# EAGLE board Met (EAGLE 9.5.1)
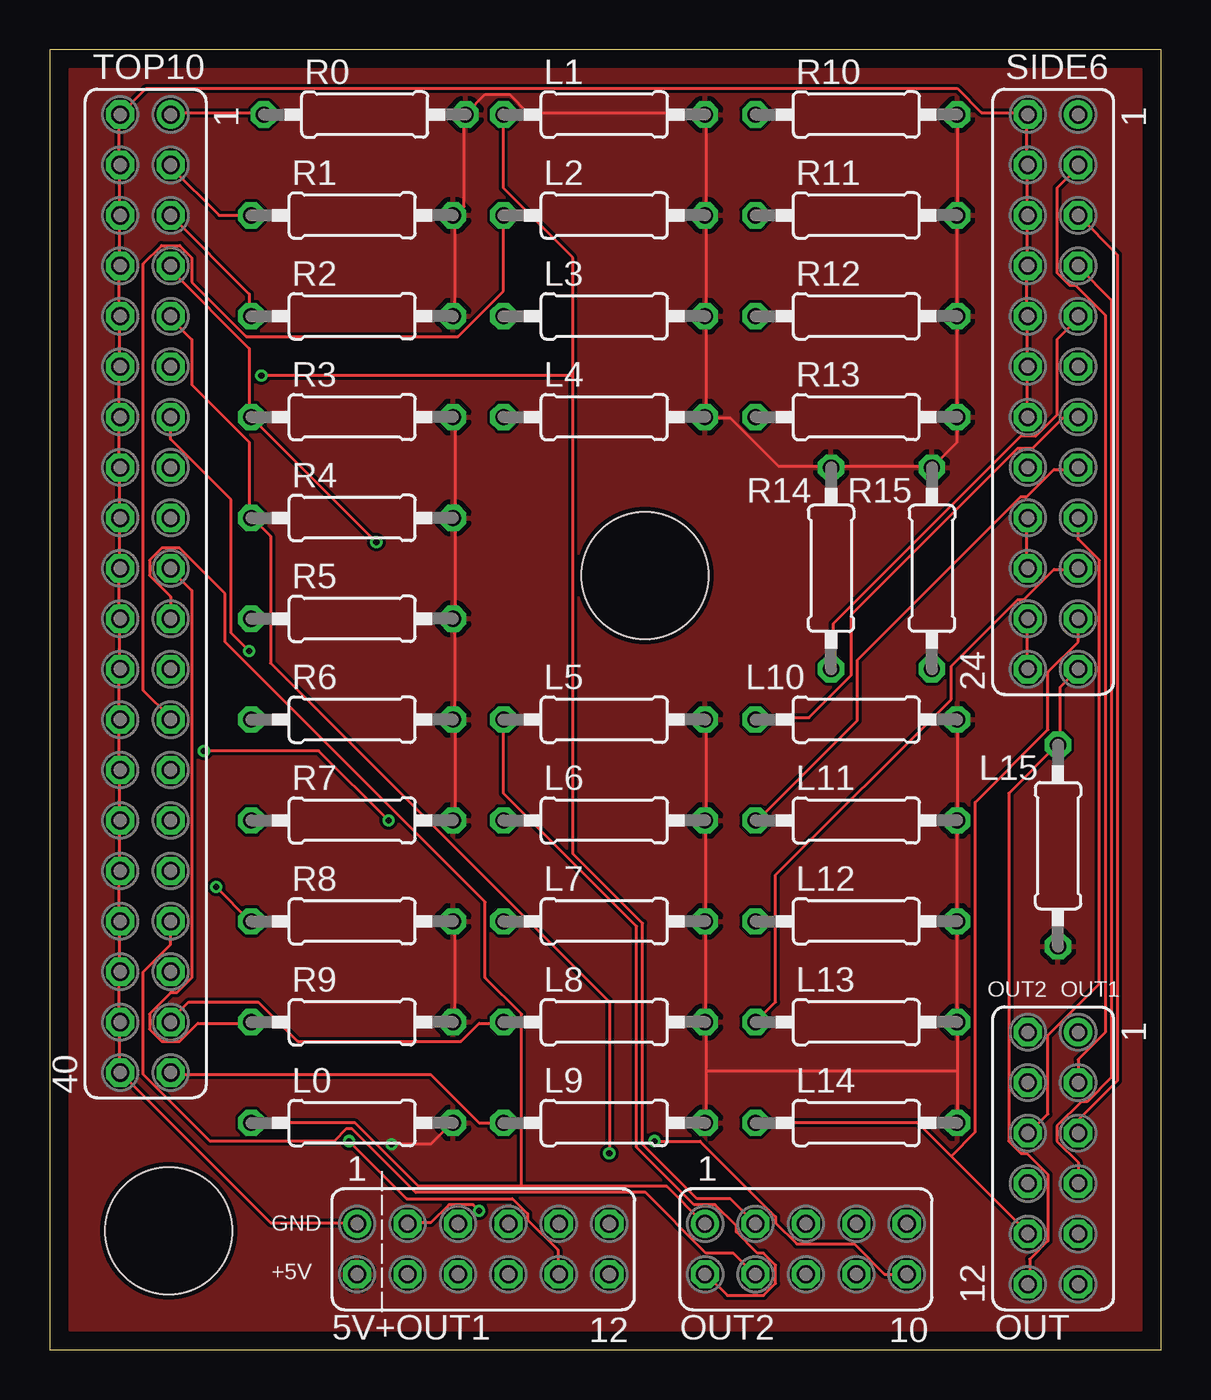
[diagram p0: board, top side]
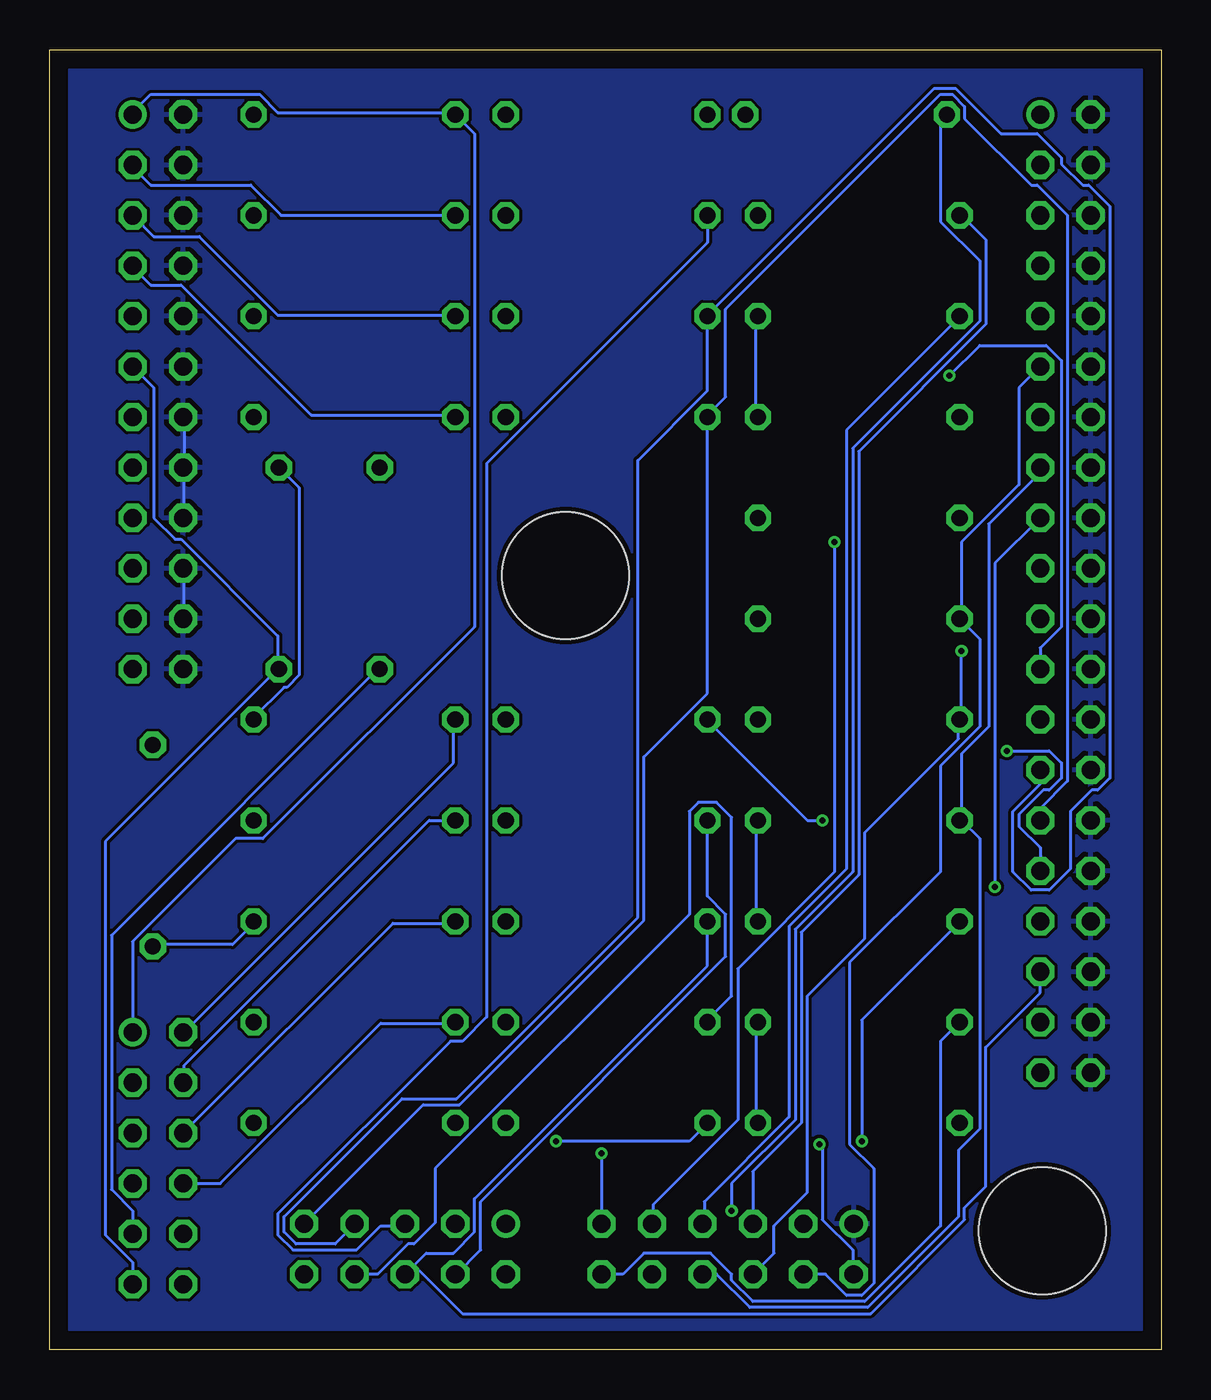
[diagram p1: board, bottom side, seen from below]

Size 56 x 65.5 mm. Coordinates in mm from the lower left corner, seen from the top.
Outline: 0,0 56,0 56,65.5 0,65.5 0,0
Copper layers (1*16): Top 0.035mm / dielectric 1.5mm / Bottom 0.035mm
Design rules "SeeedStudio_2layer_DRU_no_angle_20140221": minimum track width 6mil, minimum drill 12mil, track to track 6mil, track to pad 6mil, pad to pad 6mil, via to via 6mil, smd to smd 0mil, copper to edge 10mil, drill to drill 10mil, minimum pad ring 10mil, minimum via ring 6mil, stop-mask expansion 2mil, vias tented up to drill 100mil, thermal gap 10mil
Holes 6.4 mm at 6,6 30,39

## Footprints (pad centres in the part's own frame; a part is rotated, then mirrored left to right if it is on the bottom)
FE06-2 = drill 0.914: 1 -6.35,1.27 | drill 0.914 octagon: 2 -6.35,-1.27; 3 -3.81,1.27; 4 -3.81,-1.27; 5 -1.27,1.27; 6 -1.27,-1.27; 7 1.27,1.27; 8 1.27,-1.27; 9 3.81,1.27; 10 3.81,-1.27; 11 6.35,1.27; 12 6.35,-1.27
0207/10 = drill 0.813 octagon: 1 -5.08,0; 2 5.08,0
FE05-2 = drill 0.914: 1 -5.08,1.27 | drill 0.914 octagon: 2 -5.08,-1.27; 3 -2.54,1.27; 4 -2.54,-1.27; 5 0,1.27; 6 0,-1.27; 7 2.54,1.27; 8 2.54,-1.27; 9 5.08,1.27; 10 5.08,-1.27
FE12-2 = drill 0.914: 1 -13.97,1.27 | drill 0.914 octagon: 2 -13.97,-1.27; 3 -11.43,1.27; 4 -11.43,-1.27; 5 -8.89,1.27; 6 -8.89,-1.27; 7 -6.35,1.27; 8 -6.35,-1.27; 9 -3.81,1.27; 10 -3.81,-1.27; 11 -1.27,1.27; 12 -1.27,-1.27; 13 1.27,1.27; 14 1.27,-1.27; 15 3.81,1.27; 16 3.81,-1.27; 17 6.35,1.27; 18 6.35,-1.27; 19 8.89,1.27; 20 8.89,-1.27; 21 11.43,1.27; 22 11.43,-1.27; 23 13.97,1.27; 24 13.97,-1.27
FE20-2 = drill 0.914: 1 -24.13,1.27 | drill 0.914 octagon: 2 -24.13,-1.27; 3 -21.59,1.27; 4 -21.59,-1.27; 5 -19.05,1.27; 6 -19.05,-1.27; 7 -16.51,1.27; 8 -16.51,-1.27; 9 -13.97,1.27; 10 -13.97,-1.27; 11 -11.43,1.27; 12 -11.43,-1.27; 13 -8.89,1.27; 14 -8.89,-1.27; 15 -6.35,1.27; 16 -6.35,-1.27; 17 -3.81,1.27; 18 -3.81,-1.27; 19 -1.27,1.27; 20 -1.27,-1.27; 21 1.27,1.27; 22 1.27,-1.27; 23 3.81,1.27; 24 3.81,-1.27; 25 6.35,1.27; 26 6.35,-1.27; 27 8.89,1.27; 28 8.89,-1.27; 29 11.43,1.27; 30 11.43,-1.27; 31 13.97,1.27; 32 13.97,-1.27; 33 16.51,1.27; 34 16.51,-1.27; 35 19.05,1.27; 36 19.05,-1.27; 37 21.59,1.27; 38 21.59,-1.27; 39 24.13,1.27; 40 24.13,-1.27

## Placement (x,y rotation side)
5V+OUT1  [FE06-2]  21.84,5.08 0 top
L0  [0207/10]  15.24,11.43 0 top
L1  [0207/10]  27.94,62.23 0 top
L2  [0207/10]  27.94,57.15 0 top
L3  [0207/10]  27.94,52.07 0 top
L4  [0207/10]  27.94,46.99 0 top
L5  [0207/10]  27.94,31.75 0 top
L6  [0207/10]  27.94,26.67 0 top
L7  [0207/10]  27.94,21.59 0 top
L8  [0207/10]  27.94,16.51 0 top
L9  [0207/10]  27.94,11.43 0 top
L10  [0207/10]  40.64,31.75 0 top
L11  [0207/10]  40.64,26.67 0 top
L12  [0207/10]  40.64,21.59 0 top
L13  [0207/10]  40.64,16.51 0 top
L14  [0207/10]  40.64,11.43 0 top
L15  [0207/10]  50.8,25.4 270 top
OUT  [FE06-2]  50.55,9.65 270 top
OUT2  [FE05-2]  38.1,5.08 0 top
R0  10K  [0207/10]  15.88,62.23 0 top
R1  [0207/10]  15.24,57.15 0 top
R2  [0207/10]  15.24,52.07 0 top
R3  [0207/10]  15.24,46.99 0 top
R4  [0207/10]  15.24,41.91 0 top
R5  [0207/10]  15.24,36.83 0 top
R6  [0207/10]  15.24,31.75 0 top
R7  [0207/10]  15.24,26.67 0 top
R8  [0207/10]  15.24,21.59 0 top
R9  [0207/10]  15.24,16.51 0 top
R10  10K  [0207/10]  40.64,62.23 0 top
R11  [0207/10]  40.64,57.15 0 top
R12  [0207/10]  40.64,52.07 0 top
R13  [0207/10]  40.64,46.99 0 top
R14  [0207/10]  39.37,39.37 90 top
R15  [0207/10]  44.45,39.37 90 top
SIDE6  [FE12-2]  50.55,48.26 270 top
TOP10  [FE20-2]  4.83,38.1 270 top

## Library data of the parts
5V+OUT1 OUT OUT2 SIDE6 TOP10 = con-lsta; OC_FARNELL: unknown; OC_NEWARK: unknown
L0 L1-L15 R0 R1-R15 = rcl; SPICEPREFIX: R

## Nets
+5V: 5V+OUT1.2 L0.2 L1.2 L2.2 L3.2 L4.2 L5.2 L6.2 L7.2 L8.2 L9.2 L10.2 L11.2 L12.2 L13.2 L14.2 L15.2 R0.2 R1.2 R2.2 R3.2 R4.2 R5.2 R6.2 R7.2 R8.2 R9.2 R10.2 R11.2 R12.2 R13.2 R14.2 R15.2
GND: 5V+OUT1.1 SIDE6.2 SIDE6.4 SIDE6.6 SIDE6.8 SIDE6.10 SIDE6.12 SIDE6.14 SIDE6.16 SIDE6.18 SIDE6.20 SIDE6.22 SIDE6.24 TOP10.2 TOP10.4 TOP10.6 TOP10.8 TOP10.10 TOP10.12 TOP10.14 TOP10.16 TOP10.18 TOP10.20 TOP10.22 TOP10.24 TOP10.26 TOP10.28 TOP10.30 TOP10.32 TOP10.34 TOP10.36 TOP10.38 TOP10.40
N$1: 5V+OUT1.7 R2.1 TOP10.5
N$2: 5V+OUT1.8 R7.1 TOP10.15
N$3: 5V+OUT1.6 R6.1 TOP10.13
N$4: 5V+OUT1.4 R5.1 TOP10.11
N$5: 5V+OUT1.3 R0.1 TOP10.1
N$6: 5V+OUT1.5 R1.1 TOP10.3
N$7: 5V+OUT1.9 R3.1 TOP10.7
N$8: 5V+OUT1.11 R4.1 TOP10.9
N$9: OUT.5 R12.1 SIDE6.5
N$10: L12.1 OUT.6 SIDE6.17
N$11: 5V+OUT1.10 R8.1 TOP10.17
N$12: OUT.3 R11.1 SIDE6.3
N$13: L0.1 OUT2.1 TOP10.21
N$14: L1.1 OUT2.3 TOP10.23
N$15: L3.1 OUT2.7 TOP10.27
N$16: L4.1 OUT2.9 TOP10.29
N$17: L5.1 OUT2.2 TOP10.31
N$18: L6.1 OUT2.4 TOP10.33
N$19: L7.1 OUT2.6 TOP10.35
N$20: L8.1 OUT2.8 TOP10.37
N$23: L2.1 OUT2.5 TOP10.25
N$24: 5V+OUT1.12 R9.1 TOP10.19
N$27: L9.1 OUT2.10 TOP10.39
N$29: OUT.1 R10.1 SIDE6.1
N$30: OUT.7 R13.1 SIDE6.7
N$31: OUT.9 R14.1 SIDE6.9
N$32: OUT.11 R15.1 SIDE6.11
N$33: L10.1 OUT.2 SIDE6.13
N$34: L11.1 OUT.4 SIDE6.15
N$35: L13.1 OUT.8 SIDE6.19
N$36: L14.1 OUT.10 SIDE6.21
N$37: L15.1 OUT.12 SIDE6.23

## Tracks (layer width: path | path; a pad name or v marks a point on that pad's centre or on a via)
+5V  (via drill 0.3)
  Top 0.152: 33.07,26.67 33.07,31.7 L5.2 | 33.07,14.02 33.07,16.46 L8.2 33.07,16.61 33.07,21.49 L7.2 33.07,21.64 33.07,26.67 | 33.07,14.02 33.07,11.43 L9.2 | 33.07,26.67 L6.2 | L10.2 L11.2 L12.2 L13.2 45.72,14.02 | 45.72,14.02 L14.2 | 45.72,14.02 33.07,14.02 | 33.07,57.15 33.07,62.18 L1.2 32.92,62.33 24.08,62.33 23.16,63.25 21.95,63.25 21.03,62.33 R0.2 20.88,62.18 20.88,57.61 20.42,57.15 | 33.07,57.15 33.07,52.12 L3.2 33.07,51.97 33.07,47.09 L4.2 33.07,46.94 34.29,46.94 36.73,44.5 39.32,44.5 R14.2 39.47,44.5 44.35,44.5 R15.2 45.72,45.72 R13.2 R12.2 R11.2 R10.2 | 33.07,57.15 L2.2 | R8.2 20.42,21.49 20.42,16.61 R9.2 | v17.22,10.36 19.2,10.36 20.27,11.43 L0.2 | R7.2 20.42,26.67 20.42,31.7 R6.2 20.42,31.85 20.42,36.73 R5.2 20.42,36.88 20.42,41.91 | 20.42,41.91 20.42,46.94 R3.2 | 20.42,57.15 20.42,52.12 R2.2 | 20.42,57.15 R1.2 | 20.42,41.91 R4.2
  Bottom 0.152: L15.2 50.75,20.42 46.79,20.42 45.72,21.49 L12.2 | L0.2 20.42,11.43 20.42,16.46 R9.2 | v17.22,10.36 17.07,10.21 17.07,6.55 15.54,5.03 15.54,3.81 5V+OUT1.2 | R2.2 20.42,51.97 20.42,47.09 R3.2 | R8.2 20.42,21.64 20.42,26.67 R7.2 | R15.2 43.43,43.43 43.43,33.98 44.04,33.38 44.2,33.38 45.72,31.85 L10.2
  pour Top: 1,64.5 1,1 55,1 55,64.5
GND
  Top 0.152: SIDE6.24 49.23,34.29 49.23,36.73 SIDE6.22 | SIDE6.18 49.23,41.91 49.23,39.47 SIDE6.20 | 49.23,49.53 49.23,51.97 SIDE6.10 49.23,52.12 49.23,54.56 SIDE6.8 49.23,54.71 49.23,57.15 | 49.23,57.15 49.23,59.59 SIDE6.4 49.23,59.74 49.23,62.18 SIDE6.2 49.23,62.33 46.94,62.33 45.72,63.55 4.88,63.55 TOP10.2 3.5,62.18 3.5,59.74 TOP10.4 3.5,59.59 3.5,57.15 | 49.23,57.15 SIDE6.6 | 49.23,49.53 49.23,47.09 SIDE6.14 | 49.23,49.53 SIDE6.12 | 3.5,49.53 3.5,51.97 TOP10.10 3.5,52.12 3.5,54.56 TOP10.8 3.5,54.71 3.5,57.15 | 3.5,57.15 TOP10.6 | 3.5,34.29 3.5,36.73 TOP10.22 3.5,36.88 3.5,39.32 TOP10.20 3.5,39.47 3.5,41.91 | 3.5,41.91 3.5,44.35 TOP10.16 3.5,44.5 3.5,46.94 TOP10.14 3.5,47.09 3.5,49.53 | 3.5,41.91 TOP10.18 | 3.5,19.05 3.5,21.49 TOP10.34 3.5,21.64 3.5,24.08 TOP10.32 3.5,24.23 3.5,26.67 | 3.5,26.67 3.5,29.11 TOP10.28 3.5,29.26 3.5,31.7 TOP10.26 3.5,31.85 3.5,34.29 | 3.5,26.67 TOP10.30 | 5V+OUT1.1 15.39,6.4 11.12,6.4 TOP10.40 3.5,14.02 3.5,16.46 TOP10.38 3.5,16.61 3.5,19.05 | 3.5,19.05 TOP10.36 | 3.5,34.29 TOP10.24 | 3.5,49.53 TOP10.12
  Bottom 0.152: SIDE6.14 49.23,46.94 49.23,44.5 SIDE6.16 49.23,44.35 49.23,41.91 SIDE6.18 | SIDE6.20 49.23,39.32 49.23,36.88 SIDE6.22
  pour Bottom: 1,64.5 1,1 55,1 55,64.5
N$1
  Top 0.152: TOP10.5 10.06,53.19 10.06,52.12 R2.1
  Bottom 0.152: 5V+OUT1.7 23.01,6.4 23.01,7.47 18.75,11.73 18.75,21.34 15.85,24.23 15.85,46.33 10.21,51.97 R2.1
N$2
  Bottom 0.152: 10.06,26.67 10.06,30.02 8.69,31.39 8.69,41.6 6.1,44.2 TOP10.15 | 5V+OUT1.8 22.4,3.81 20.73,2.13 14.78,2.13 10.21,6.71 10.21,10.06 9.14,11.12 9.14,25.76 10.06,26.67 | 10.06,26.67 R7.1
N$3  (via drill 0.3)
  Top 0.152: TOP10.13 6.1,45.87 9.14,42.82 9.14,36.12 v10.06,35.2
  Bottom 0.152: 5V+OUT1.6 19.51,4.88 19.51,6.25 17.83,7.92 17.83,17.83 14.94,20.73 14.94,26.06 10.21,30.79 10.21,31.7 R6.1 10.06,31.85 v10.06,35.2
N$4
  Bottom 0.152: TOP10.11 7.16,48.46 7.16,43.59 10.06,40.69 10.06,36.88 R5.1 9.14,35.81 9.14,31.39 11.12,29.41 11.12,24.08 15.7,19.51 15.7,10.36 14.48,9.14 14.48,3.35 15.09,2.74 15.85,2.74 16.92,3.81 5V+OUT1.4
N$5  (via drill 0.3)
  Top 0.152: R0.1 10.67,62.33 6.1,62.33 TOP10.1 | v21.64,7.01 21.34,7.32 20.12,7.32 19.2,6.4 18.14,6.4 5V+OUT1.3
  Bottom 0.152: v21.64,7.01 21.64,8.38 18.44,11.58 18.44,21.18 15.54,24.08 15.54,45.41 9.14,51.82 9.14,54.86 11.12,56.84 11.12,61.87 10.82,62.18 R0.1
N$6
  Top 0.152: R1.1 8.53,57.15 6.1,59.59 TOP10.3
  Bottom 0.152: 5V+OUT1.5 20.57,8.99 18.14,11.43 18.14,21.03 15.24,23.93 15.24,45.26 8.84,51.66 8.84,55.93 10.06,57.15 R1.1
N$7  (via drill 0.3)
  Top 0.152: TOP10.7 6.1,54.41 10.06,50.44 10.06,47.09 R3.1 v16.46,40.69
  Bottom 0.152: v16.46,40.69 16.46,24.08 21.34,19.2 21.34,11.58 25.6,7.32 25.6,6.4 5V+OUT1.9
N$8  (via drill 0.3)
  Top 0.152: TOP10.9 6.1,51.97 7.16,50.9 7.16,48.62 10.06,45.72 10.06,41.91 R4.1 10.21,41.91 11.12,41 11.12,34.59 28.19,17.53 v28.19,9.91
  Bottom 0.152: v28.19,9.91 5V+OUT1.11
N$9
  Top 0.152: OUT.5 51.82,11.58 53.8,13.56 53.8,55.17 SIDE6.5
  Bottom 0.152: SIDE6.5 50.75,56.08 48.46,56.08 44.5,52.12 35.66,52.12 R12.1
N$10
  Top 0.152: SIDE6.17 51.82,40.84 52.88,39.78 52.88,18.44 50.29,15.85 50.29,11.89 49.38,10.97 OUT.6
  Bottom 0.152: OUT.6 38.71,21.49 35.66,21.49 L12.1
N$11  (via drill 0.3)
  Top 0.152: v8.38,23.32 10.06,21.64 R8.1 | v15.09,10.52 17.98,7.62 23.32,7.62 24.08,6.86 24.08,6.55 25.6,5.03 25.6,3.81 5V+OUT1.10
  Bottom 0.152: v8.38,23.32 8.38,39.62 TOP10.17 | v15.09,10.52 15.09,16.61 10.21,21.49 R8.1
N$12
  Top 0.152: OUT.3 51.82,14.63 53.19,16 53.19,52.12 51.66,53.65 51.36,53.65 50.75,54.25 50.75,58.52 51.82,59.59 SIDE6.3
  Bottom 0.152: R11.1 44.35,57.15 45.87,58.67 50.9,58.67 51.82,59.59 SIDE6.3
N$13
  Top 0.152: L0.1 15.39,11.43 18.59,8.23 23.77,8.23 | 23.77,8.23 31.09,8.23 32.92,6.4 OUT2.1 | TOP10.21 6.1,37.95 5.03,39.01 5.03,39.78 5.64,40.39 6.55,40.39 8.84,38.1 8.84,35.66 21.95,22.55 21.95,18.75 23.77,16.92 23.77,8.23
N$14  (via drill 0.3)
  Top 0.152: L1.1 22.86,58.52 26.36,55.02 26.36,49.07 | 26.36,49.07 26.36,24.99 29.87,21.49 29.87,10.36 32.61,7.62 34.29,7.62 OUT2.3 | 26.36,49.07 v10.67,49.07
  Bottom 0.152: TOP10.23 6.1,35.36 5.03,36.42 5.03,49.84 5.79,50.6 9.14,50.6 v10.67,49.07
N$15
  Bottom 0.152: OUT2.7 40.69,6.25 41.6,5.33 43.59,5.33 44.2,5.94 44.2,6.71 38.25,12.65 35.51,12.65 26.36,21.79 26.36,44.81 22.86,48.31 L3.1 22.86,52.12 11.43,63.55 10.36,63.55 8.08,61.27 6.25,61.27 5.03,60.05 5.03,59.74 3.96,58.67 3.66,58.67 2.59,57.61 2.59,28.8 3.2,28.19 3.5,28.19 4.57,27.13 4.57,24.23 5.64,23.16 6.55,23.16 7.47,24.08 7.47,27.13 6.1,28.5 TOP10.27
N$16
  Bottom 0.152: OUT2.9 37.19,12.34 35.36,12.34 26.06,21.64 26.06,29.87 22.86,33.07 L4.1 22.86,47.09 21.95,48.01 21.95,52.43 11.12,63.25 10.52,63.25 9.91,62.64 9.91,62.03 6.55,58.67 6.25,58.67 4.72,57.15 4.72,28.65 6.1,27.28 TOP10.29
N$17  (via drill 0.3)
  Top 0.152: L5.1 22.86,28.04 29.57,21.34 29.57,10.21 32.46,7.32 33.53,7.32 34.59,6.25 34.59,5.94 35.66,4.88 35.97,4.88 36.58,4.27 36.58,3.35 35.97,2.74 34.14,2.74 33.07,3.81 OUT2.2 | v7.77,30.18 13.56,30.18 v17.07,26.67
  Bottom 0.152: TOP10.31 6.1,25.3 7.16,26.36 7.16,26.98 5.94,28.19 5.64,28.19 5.03,28.8 5.03,29.57 5.64,30.18 v7.77,30.18 | v17.07,26.67 17.83,26.67 22.86,31.7 L5.1
N$18
  Top 0.152: TOP10.33 6.1,20.42 4.72,19.05 4.72,13.87 8.08,10.52 14.33,10.52 14.94,11.12 15.24,11.12 18.44,7.92 30.02,7.92 33.07,4.88 34.44,4.88 35.51,3.81 OUT2.4
  Bottom 0.152: L6.1 22.86,22.86 21.95,21.95 21.95,19.81 34.29,7.47 34.29,5.03 35.51,3.81 OUT2.4
N$19
  Bottom 0.152: L7.1 22.86,19.36 34.59,7.62 34.59,5.94 35.66,4.88 37.03,4.88 37.64,4.27 | TOP10.35 6.1,17.98 8.84,15.24 8.84,8.23 9.91,7.16 9.91,6.55 14.63,1.83 35.2,1.83 37.64,4.27 | 37.64,4.27 OUT2.6
N$20
  Top 0.152: L8.1 22.86,16.46 21.64,16.46 20.73,15.54 12.5,15.54 10.52,17.53 7.01,17.53 6.1,16.61 TOP10.37
  Bottom 0.152: OUT2.8 39.47,3.81 37.95,5.33 37.64,5.33 36.58,6.4 36.58,9.14 23.77,21.95 23.77,27.13 23.32,27.58 22.4,27.58 21.64,26.82 21.64,17.83 22.86,16.61 L8.1
N$23
  Top 0.152: L2.1 22.86,53.34 20.57,51.05 9.91,51.05 7.16,53.8 7.16,55.02 6.55,55.63 5.64,55.63 4.72,54.71 4.72,33.22 6.1,31.85 TOP10.25
  Bottom 0.152: L2.1 22.86,55.78 33.98,44.65 33.98,16.76 35.2,15.54 35.81,15.54 44.5,6.86 44.5,5.79 43.74,5.03 40.54,5.03 39.32,6.25 38.1,6.25 OUT2.5
N$24
  Top 0.152: R9.1 10.06,16.46 7.47,16.46 6.55,15.54 5.64,15.54 5.03,16.15 5.03,16.92 6.1,17.98 6.4,17.98 7.16,18.75 7.16,38.25 6.1,39.32 TOP10.19
  Bottom 0.152: 5V+OUT1.12 27.13,3.81 26.06,4.88 22.71,4.88 21.64,3.81 21.64,3.5 20.57,2.44 14.94,2.44 11.12,6.25 11.12,15.54 R9.1
N$27  (via drill 0.3)
  Top 0.152: L9.1 21.64,11.43 19.2,13.87 6.1,13.87 TOP10.39 | OUT2.10 42.06,3.81 40.54,5.33 37.64,5.33 36.58,6.4 36.58,6.71 32.77,10.52 v30.48,10.52
  Bottom 0.152: v30.48,10.52 23.77,10.52 L9.1
N$29
  Bottom 0.152: SIDE6.1 51.82,62.33 50.9,63.25 45.41,63.25 44.5,62.33 35.66,62.33 R10.1 34.59,61.27 34.59,36.42 45.26,25.76 46.63,25.76 51.82,20.57 OUT.1
N$30
  Top 0.152: OUT.7 51.82,9.45 50.75,10.52 50.75,11.28 51.97,12.5 52.27,12.5 53.49,13.72 53.49,52.88 51.82,54.56 SIDE6.7
  Bottom 0.152: R13.1 35.66,47.09 42.82,47.09 49.38,53.65 50.9,53.65 51.82,54.56 SIDE6.7
N$31
  Top 0.152: R14.1 39.47,34.29 39.47,36.58 48.92,46.02 49.68,46.02 50.75,47.09 50.75,50.9 51.82,51.97 SIDE6.9
  Bottom 0.152: OUT.9 51.82,7.01 52.88,8.08 52.88,20.88 39.47,34.29 R14.1
N$32
  Bottom 0.152: 44.5,34.29 44.5,35.97 49.38,40.84 49.68,40.84 50.75,41.91 50.75,48.46 SIDE6.11 | OUT.11 51.82,4.42 53.19,5.79 53.19,25.6 44.5,34.29 | 44.5,34.29 R15.1
N$33
  Top 0.152: SIDE6.13 51.82,46.94 51.05,46.94 49.53,45.41 48.77,45.41 40.39,37.03 40.39,33.98 38.25,31.85 35.66,31.85 L10.1
  Bottom 0.152: L10.1 35.66,31.7 35.66,29.57 49.23,16 OUT.2
N$34
  Top 0.152: SIDE6.15 51.82,44.35 50.6,44.35 49.23,42.98 48.92,42.98 40.69,34.75 40.69,31.7 35.66,26.67 L11.1
  Bottom 0.152: L11.1 36.88,26.67 49.23,14.33 49.23,13.56 OUT.4
N$35
  Top 0.152: L13.1 36.58,17.53 36.58,23.93 45.41,32.77 45.41,34.44 48.77,37.8 49.07,37.8 50.6,39.32 51.82,39.32 SIDE6.19
  Bottom 0.152: OUT.8 47.4,8.38 39.32,16.46 35.66,16.46 L13.1
N$36
  Top 0.152: L14.1 43.74,11.43 45.41,9.75 | 45.41,9.75 49.23,5.94 OUT.10 | SIDE6.21 51.82,35.66 50.29,34.14 50.29,31.24 46.63,27.58 46.63,10.97 45.41,9.75
N$37
  Top 0.152: SIDE6.23 50.9,33.38 50.9,30.48 L15.1 50.75,30.48 48.31,28.04 48.31,10.52 48.92,9.91 49.23,9.91 50.29,8.84 50.29,5.49 49.38,4.57 49.38,3.35 OUT.12

## Text on the board
tNames: OUT2 | OUT1 | | / | / | / | / | / | | GND / / +5V